# Altium PCB LCD-CH.PcbDoc
Units mm, origin at the board's own origin, x right, y up, seen from the top; angles counter-clockwise.
Board outline 152.4 x 101.6 mm, 2 copper layers (Top Layer, Bottom Layer); 3 components, 10 nets, 53 pads, 4 vias.
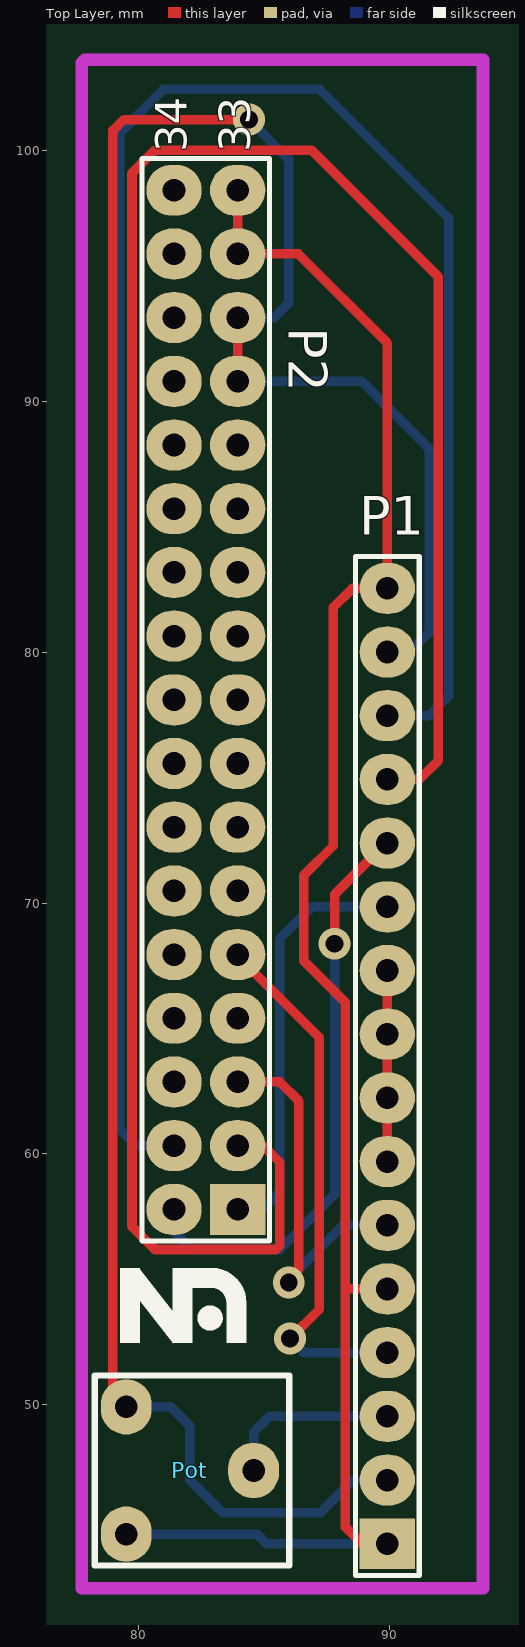
[diagram p0: Top Layer view]
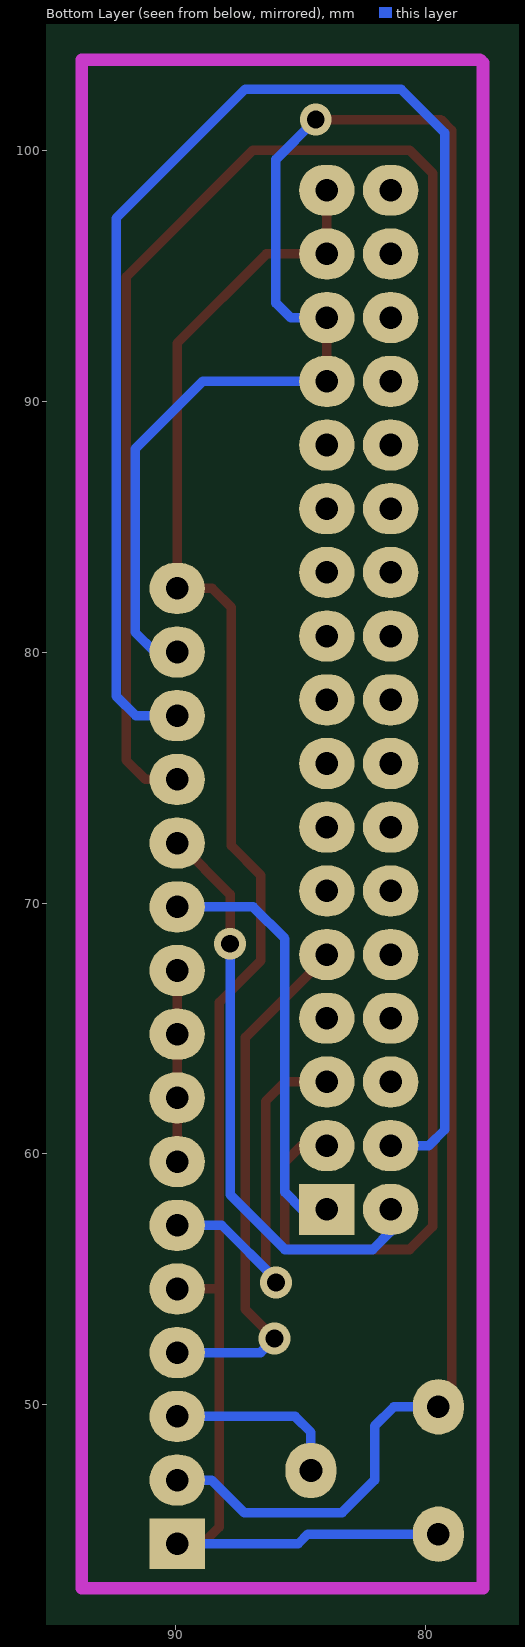
[diagram p1: Bottom Layer view, seen from below]

## Layer stack, top to bottom
Top Layer: signal copper 0.0356
Dielectric: dielectric 0.32, FR-4, Dk 4.8
Bottom Layer: signal copper 0.0356

## Board outline
25.4,25.4 177.8,25.4 177.8,127 25.4,127

## Design rules (kind name [scope] priority, off if disabled: settings)
Clearance [All] p1: gap=0.381
PolygonConnect [All] p1: connectstyle=Relief reliefconductorwidth=0.254 reliefentries=4 polygonreliefangle="90 Angle"
RoutingVias [All] p1: holewidth=0.711 width=1.27 viastyle="Through Hole" minholewidth=0.711 minwidth=1.27 maxholewidth=0.711 maxwidth=1.27
SilkscreenOverComponentPads SilkToSolderMaskClearance [IsPad] p1: minsilkscreentomaskgap=0.254
SolderMaskExpansion [All] p1: expansion=0.102
Width [All] p1: maxlimit=0.508 minlimit=0.381 preferedwidth=0.381
27 further rules are at their usual default settings.

## Classes and differential pairs
component class lcd_l: P1 P2

## Components (designator, comment, footprint, x,y, rotation, side; value= is the part's Value field where it differs from the comment)
P1 "Header 16" HDR1X16 89.916,44.45 r90 top
P2 "Header 17X2" HDR2X17 83.947,57.785 r90 top
Pot "Comment" pot 79.502,49.911 r270 top

## Footprints (in the part's own frame and the unit in brackets; to place one, negate y for a bottom-side part, rotate by r counter-clockwise, add the part's x,y. Pads: shape width x height; smd on the part's side, far side on the other; paste and mask are expansions set on the pad)
HDR1X16 [mil] "Connector; Header; 16 Position"
  rect 80x87 hole 35.43: 1(0,0)
  oval 80x87 hole 35.43: 2(100,0) 3(200,0) 4(300,0) 5(400,0) 6(500,0) 7(600,0) 8(700,0) 9(800,0) 10(900,0) 11(1000,0) 12(1100,0) 13(1200,0) 14(1300,0) 15(1400,0) 16(1500,0)
  silkscreen extent -50,-50 1550,50
HDR2X17 [mil] "Connector; Header; 17x2 Position"
  rect 80x87 hole 35.43: 1(0,0)
  oval 80x87 hole 35.43: 2(0,100) 3(100,0) 4(100,100) 5(200,0) 6(200,100) 7(300,0) 8(300,100) 9(400,0) 10(400,100) 11(500,0) 12(500,100) 13(600,0) 14(600,100) 15(700,0) 16(700,100) 17(800,0) 18(800,100) 19(900,0) 20(900,100) 21(1000,0) 22(1000,100) 23(1100,0) 24(1100,100) 25(1200,0) 26(1200,100) 27(1300,0) 28(1300,100) 29(1400,0) 30(1400,100) 31(1500,0) 32(1500,100) 33(1600,0) 34(1600,100)
  silkscreen extent -50,-50 1650,150
pot [mil]
  oval 87x80 hole 35.43: 1(0,0) 2(200,0) 3(100,200)
  silkscreen extent -49,-49 249,256

## Part data
P1: "Header, 16-Pin"
P2: "Header, 17-Pin, Dual row"

## Via types
v1: diameter 1.27, hole 0.711, Top Layer to Bottom Layer, 4 vias

## Nets (pads, with @x,y where several pads share a name; then routed paths per layer and width w, separated by ;. In a path a pad name is that pad's centre, name@x,y a point inside that pad or via, vN(x,y) a via of type N, cw(c..) or ccw(c..) an arc to the next point about the centre after c; other vN are vias at no path point)
DATA4: P1.11 P2.1 | length 16.9
  Bottom Layer w0.381: P2.1 84.938,57.785 85.623,58.471 85.623,68.58 86.893,69.85 P1.11
DATA5: P1.12 P2.2 | length 23.4
  Top Layer w0.381: v1(87.808,68.377) 87.808,70.345 89.852,72.39 P1.12
  Bottom Layer w0.381: P2.2 81.407,56.896 82.118,56.185 85.623,56.185 87.808,58.369 v1(87.808,68.377)
DATA6: P1.13 P2.3 | length 89.9
  Top Layer w0.381: P2.3 84.963,60.325 85.623,59.665 85.623,56.342 85.467,56.185 80.645,56.185 79.731,57.099 79.731,99.111 80.645,100.025 86.893,100.025 91.948,94.971 91.948,75.692 91.186,74.93 P1.13
DATA7: P1.14 P2.4 | length 79.9
  Bottom Layer w0.381: P2.4 79.883,60.325 79.248,60.96 79.248,100.711 80.988,102.451 87.211,102.451 92.354,97.307 92.354,78.257 91.567,77.47 P1.14
E: P1.6 P2.5 | length 15.1
  Top Layer w0.381: P2.5 85.623,62.865 86.385,62.103 86.385,55.397 85.979,54.991 v1(85.979,54.864)
  Bottom Layer w0.381: v1(85.979,54.864) 85.979,54.991 88.138,57.15 P1.6
EMPTY: P1.7 P1.8 P1.9 P1.10 | length 7.6
  Top Layer w0.381: P1.7 P1.8 P1.9 P1.10
GND: P1.1 P1.5 P1.16 P2.31 P2.33 Pot.2 | length 74.3
  Top Layer w0.381: P2.33 P2.31 86.36,95.885 89.916,92.329 P1.16 88.519,82.55 87.757,81.788 87.757,72.283 86.589,71.115 86.589,67.691 88.24,66.04 88.24,54.61 ; P1.1 88.9,44.45 88.24,45.11 88.24,54.61 ; P1.5 88.24,54.61
  Bottom Layer w0.381: Pot.2 84.709,44.831 85.09,44.45 P1.1
RS: P1.4 P2.9 | length 21.3
  Top Layer w0.381: P2.9 83.947,67.894 87.198,64.643 87.198,53.797 v1(86.03,52.629)
  Bottom Layer w0.381: v1(86.03,52.629) 86.589,52.07 P1.4
VDD: P1.2 P1.15 P2.27 P2.29 Pot.1 | length 101.6
  Top Layer w0.381: Pot.1 78.969,50.444 78.969,100.813 79.4,101.244 v1(84.391,101.244) ; P2.27 P2.29
  Bottom Layer w0.381: Pot.1 81.28,49.911 82.042,49.149 82.042,46.99 83.337,45.695 87.249,45.695 88.544,46.99 P1.2 ; P2.27 88.9,90.805 91.592,88.113 91.592,80.797 90.805,80.01 P1.15 ; P2.29 85.395,93.345 85.979,93.929 85.979,99.657 v1(84.391,101.244)
VEE: P1.3 Pot.3 | length 7.1
  Bottom Layer w0.381: Pot.3 84.582,48.895 85.217,49.53 P1.3
pads on no net: P2.6 P2.7 P2.8 P2.10 P2.11 P2.12 P2.13 P2.14 P2.15 P2.16 P2.17 P2.18 P2.19 P2.20 P2.21 P2.22 P2.23 P2.24 P2.25 P2.26 P2.28 P2.30 P2.32 P2.34

## Keep-outs
Keep-Out Layer:
  lines w0.508: 77.724,42.672 93.726,42.672 93.726,103.632 77.851,103.632 77.724,103.505 77.724,42.672

## Silkscreen, mask and mechanical layers (free items; w line width, h text height)
Top Overlay:
  circle w0.5: c82.848,53.451 r0.255
  rectangle: 79.248,52.451 80.048,55.451
  rectangle: 81.348,52.451 82.148,55.451
  region: 81.365,52.433 81.995,52.925 80.049,55.416 79.419,54.923
  rectangle: 83.498,52.451 84.298,54.051
  region: 82.898,54.651 82.898,55.451 81.348,55.451 81.348,54.651
  lines w0.8: 82.898,55.051 cw(c82.898,54.051) 83.898,54.051

## Text inside footprints (layer, text, board x,y; h text height)
P2: Top Overlay "34" at 81.915,99.949 h1.27 r90; Top Overlay "33" at 84.455,99.949 h1.27 r90